# Altium PCB BatteryTestV1.1.PcbDoc (part 1 of 2)
Units mm, origin at the board's own origin, x right, y up, seen from the top; angles counter-clockwise.
Board outline 100 x 100 mm, 2 copper layers (Top Layer, Bottom Layer); 261 components, 215 nets, 797 pads, 447 vias.
Unrouted connection lines stored in the file: 1.
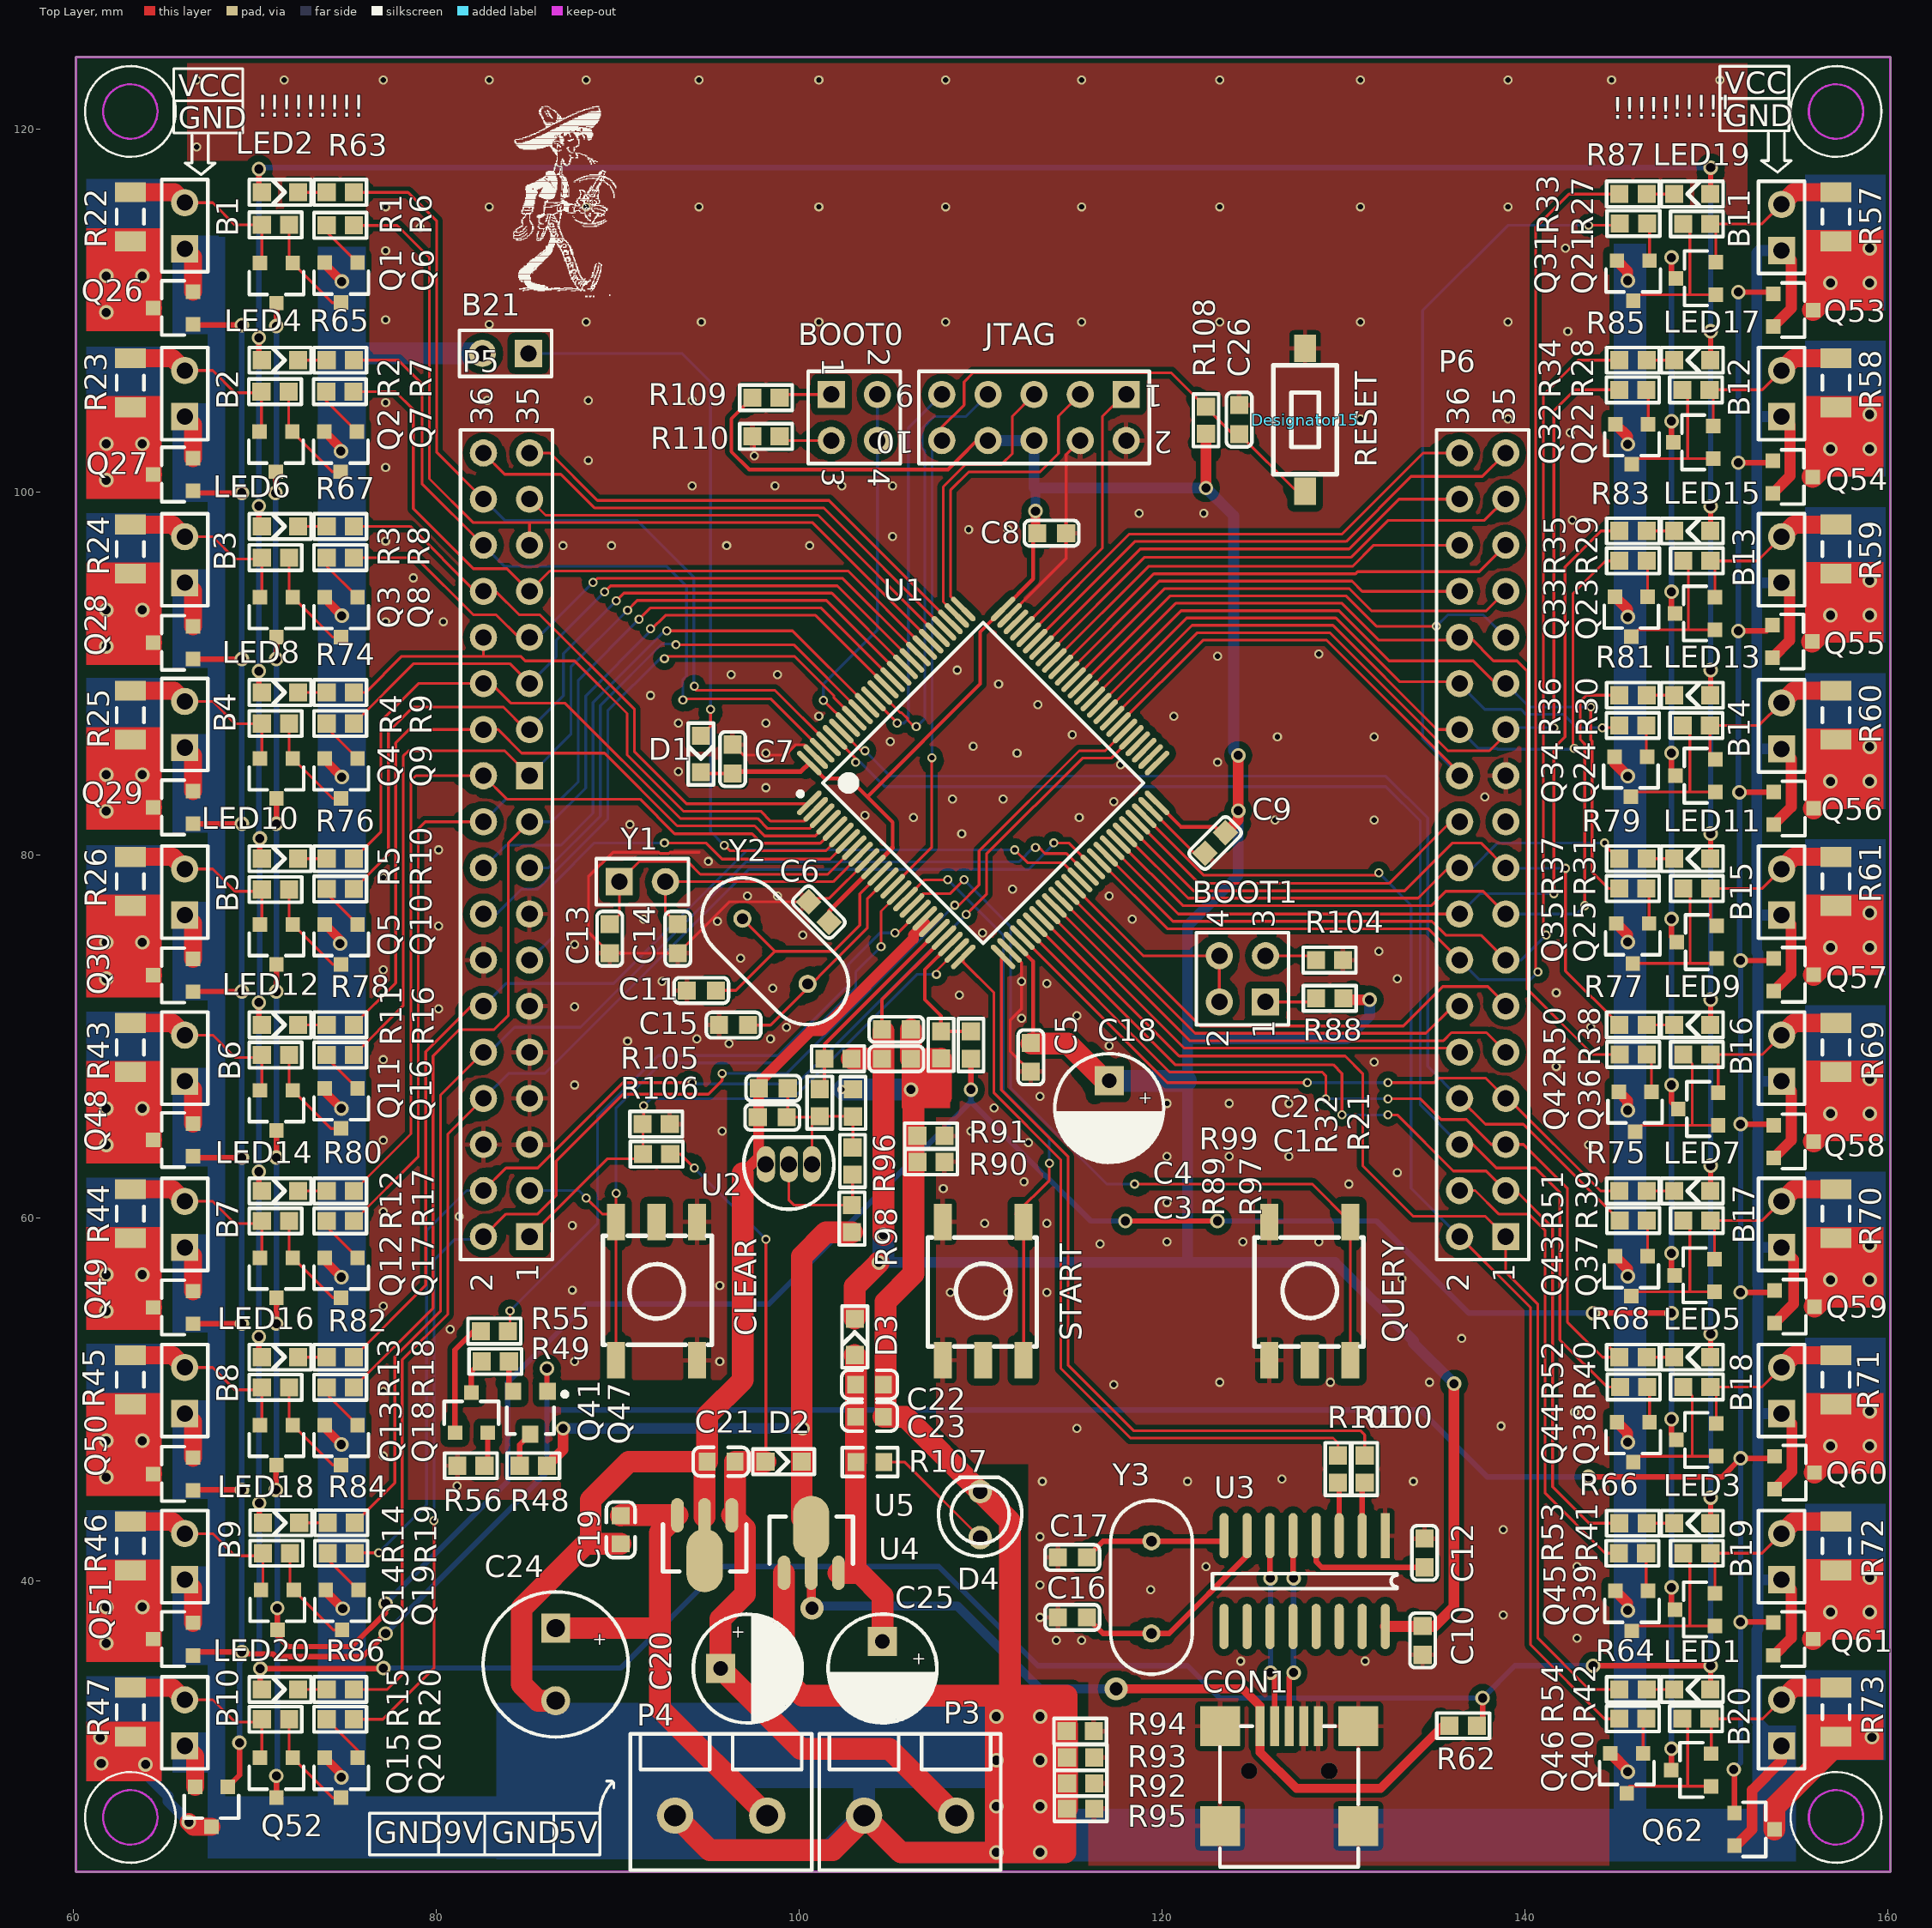
[diagram p0: Top Layer view]
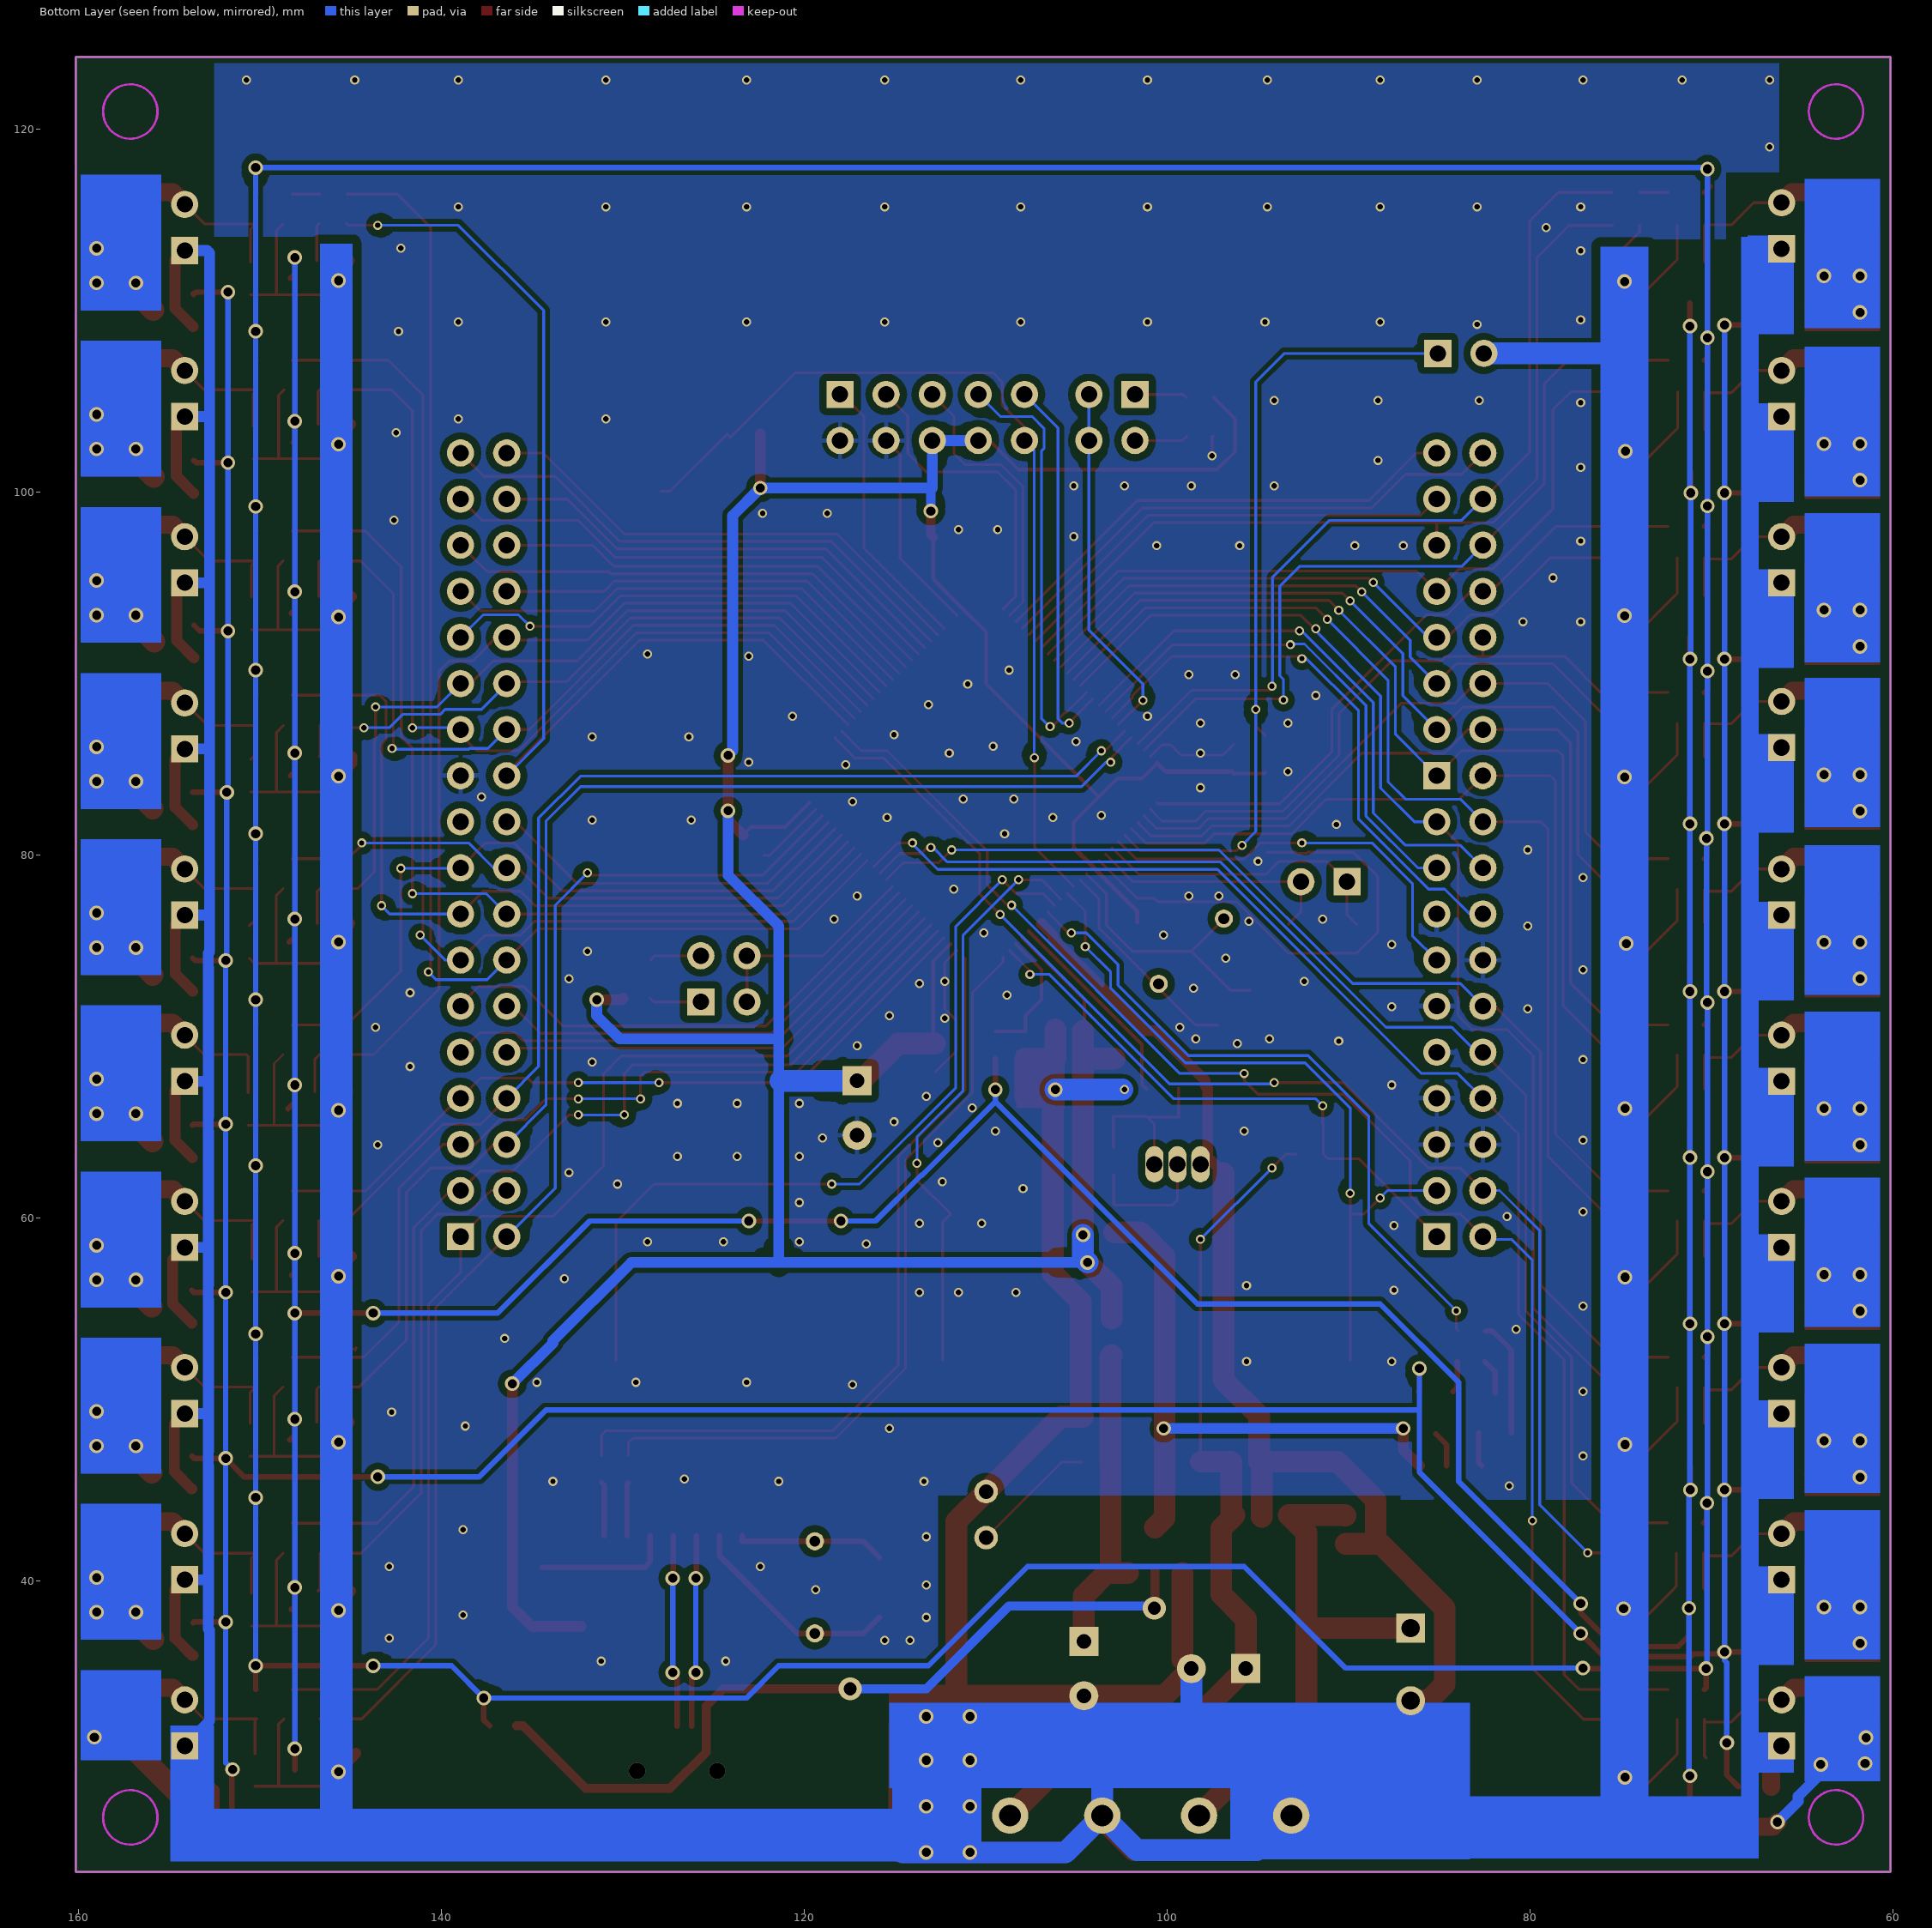
[diagram p1: Bottom Layer view, seen from below]

## Layer stack, top to bottom
Top Solder: solder mask 0.0102, Solder Resist, Dk 3.5
Top Layer: signal copper 0.0356
Dielectric 1: dielectric 0.32, FR-4, Dk 4.8
Bottom Layer: signal copper 0.0356
Bottom Solder: solder mask 0.0102, Solder Resist, Dk 3.5

## Board outline
60.147,23.952 60.147,123.952 160.147,123.952 160.147,23.952

## Design rules (kind name [scope] priority, off if disabled: settings)
Clearance [All] p1: gap=0.254 ignorepadtopadclearanceinfootprint=FALSE except(0: Arc-Hole Track-Hole SMDPad-Hole THPad-Hole Via-Hole Fill-Hole Poly-Hole Region-Hole Text-Hole)
PolygonConnect [All] p1: connectstyle=Relief reliefconductorwidth=0.254 reliefentries=4 polygonreliefangle="90 Angle" airgapwidth=0.254
RoutingVias [All] p1: holewidth=0.711 width=1.27 viastyle="Through Hole" minholewidth=0.711 minwidth=1.27 maxholewidth=0.711 maxwidth=1.27
SolderMaskExpansion [All] p1: expansion=0.102
Width [All] p1: maxlimit=0.254 minlimit=0.254 preferedwidth=0.254
30 further rules are at their usual default settings.

## Components (designator, comment, footprint, x,y, rotation, side; value= is the part's Value field where it differs from the comment)
B1 "Header 2" HDR1X2 66.147,113.387 r90 top
B2 "Header 2" HDR1X2 66.147,104.14 r90 top
B3 "Header 2" HDR1X2 66.147,94.981 r90 top
B4 "Header 2" HDR1X2 66.147,85.903 r90 top
B5 "Header 2" HDR1X2 66.147,76.67 r90 top
B6 "Header 2" HDR1X2 66.147,67.514 r90 top
B7 "Header 2" HDR1X2 66.147,58.359 r90 top
B8 "Header 2" HDR1X2 66.147,49.203 r90 top
B9 "Header 2" HDR1X2 66.147,40.048 r90 top
B10 "Header 2" HDR1X2 66.147,30.892 r90 top
B11 "Header 2" HDR1X2 154.147,113.292 r90 top
B12 "Header 2" HDR1X2 154.147,104.14 r90 top
B13 "Header 2" HDR1X2 154.147,94.981 r90 top
B14 "Header 2" HDR1X2 154.147,85.825 r90 top
B15 "Header 2" HDR1X2 154.147,76.67 r90 top
B16 "Header 2" HDR1X2 154.147,67.514 r90 top
B17 "Header 2" HDR1X2 154.147,58.359 r90 top
B18 "Header 2" HDR1X2 154.147,49.203 r90 top
B19 "Header 2" HDR1X2 154.147,40.048 r90 top
B20 "Header 2" HDR1X2 154.147,30.892 r90 top
B21 "Header 2" HDR1X2 85.09,107.62 r180 top
BOOT0 "Header 2X2" HDR2X2 101.778,105.359 r270 top (schematic designator P8)
BOOT1 "Header 2X2" HDR2X2 125.705,71.888 r90 top locked (schematic designator P7)
C1 "1uF" C_0603 105.365,68.749 r180 top
C2 "10nF" C_0603 105.365,70.374 r180 top
C3 "100nF" C_0603 98.527,65.532 r0 top
C4 "10uF" C_0603 98.577,67.132 r0 top
C5 "100nF" C_0603 112.776,68.834 r90 top
C6 "100nF" C_0603 101.092,76.835 r315 top
C7 "100nF" C_0603 96.342,85.268 r270 top
C8 "100nF" C_0603 113.919,97.714 r180 top
C9 "100nF" C_0603 122.936,80.645 r45 top
C10 "1UF" C_0603 134.366,36.703 r90 top
C11 "20pF" C_0603 94.615,72.517 r180 top
C12 "0.01UF" C_0603 134.472,41.527 r270 top
C13 "20pF" C_0603 89.57,75.367 r270 top
C14 "20pF" C_0603 93.32,75.367 r270 top
C15 "20pF" C_0603 96.393,70.612 r180 top
C16 "22pF" C_0603 115.062,37.973 r180 top
C17 "22pF" C_0603 115.062,41.275 r180 top
C18 "220uF/16V" C_6*7mm 117.094,66.04 r90 top
C19 "100nF" LC-0603_C 90.172,42.802 r90 top
C20 "220uF/16V" C_6*7mm 97.172,35.152 r180 top
C21 "100nF" LC-0603_C 95.697,46.552 r0 top
C22 "10uF" LC-0603_C 103.886,50.8 r0 top
C23 "10uF" LC-0603_C 103.886,49.022 r0 top
C24 "330uF/25V" C_8*12 86.589,35.382 r90 top
C25 "220uF/16V" C_6*7mm 104.597,35.154 r90 top
C26 "SMD-C" C_0603 124.257,103.975 r270 top
CLEAR "Key" KEY-3 92.147,55.952 r270 top (schematic designator K1)
CON1 "USB" MiniUSB 127.012,31.977 r0 top
D1 "Diode" DIODE-0603 94.59,85.547 r270 top
D2 "Diode" DIODE-0603 99.147,46.552 r0 top
D3 "Diode" DIODE-0603 103.072,53.427 r90 top
D4 "LED_R" LED_A2 109.982,43.637 r270 top
Designator15 "Comment" Key-6 127.889,103.962 r270 top
JTAG "Header 5X2" HDR2X5 118.034,105.359 r180 top (schematic designator P2)
LED1 "SMD-LED" DIODE-0603 149.225,34.002 r180 top
LED2 "SMD-LED" DIODE-0603 71.399,116.497 r0 top value=LED
LED3 "SMD-LED" DIODE-0603 149.225,43.158 r180 top
LED4 "SMD-LED" DIODE-0603 71.399,107.25 r0 top
LED5 "SMD-LED" DIODE-0603 149.225,52.313 r180 top value=LED
LED6 "SMD-LED" DIODE-0603 71.399,98.091 r0 top
LED7 "SMD-LED" DIODE-0603 149.225,61.469 r180 top value=LED
LED8 "SMD-LED" DIODE-0603 71.399,88.935 r0 top
LED9 "SMD-LED" DIODE-0603 149.225,70.624 r180 top value=LED
LED10 "SMD-LED" DIODE-0603 71.399,79.78 r0 top value=LED
LED11 "SMD-LED" DIODE-0603 149.225,79.78 r180 top
LED12 "SMD-LED" DIODE-0603 71.399,70.624 r0 top
LED13 "SMD-LED" DIODE-0603 149.225,88.783 r180 top value=LED
LED14 "SMD-LED" DIODE-0603 71.399,61.469 r0 top value=LED
LED15 "SMD-LED" DIODE-0603 149.225,97.837 r180 top
LED16 "SMD-LED" DIODE-0603 71.399,52.313 r0 top value=LED
LED17 "SMD-LED" DIODE-0603 149.225,107.25 r180 top
LED18 "SMD-LED" DIODE-0603 71.45,43.183 r0 top value=LED
LED19 "SMD-LED" DIODE-0603 149.225,116.402 r180 top value=LED
LED20 "SMD-LED" DIODE-0603 71.399,34.002 r0 top
P3 "Header 2" 2Pin_5.08 106.121,27.051 r180 top
P4 "Header 2" 2Pin_5.08 95.707,27.051 r180 top
P5 "Header 18X2" HDR2X18#1 85.147,58.952 r90 top locked
P6 "Header 18X2" HDR2X18#2 138.947,58.952 r90 top
Q1 "P_MOS" SOT-23-MOS 71.199,111.494 r270 top
Q2 "P_MOS" SOT-23-MOS 71.174,102.203 r270 top
Q3 "P_MOS" SOT-23-MOS 71.199,93.091 r270 top
Q4 "P_MOS" SOT-23-MOS 71.199,84.201 r270 top
Q5 "P_MOS" SOT-23-MOS 71.199,75.057 r270 top
Q6 "SMD-TRAN" SOT-23#1 74.767,111.519 r270 top
Q7 "SMD-TRAN" SOT-23#1 74.742,102.203 r270 top
Q8 "SMD-TRAN" SOT-23#1 74.767,93.091 r270 top value=NPN
Q9 "SMD-TRAN" SOT-23#1 74.767,84.201 r270 top value=NPN
Q10 "SMD-TRAN" SOT-23#1 74.767,75.057 r270 top
Q11 "P_MOS" SOT-23-MOS 71.199,65.913 r270 top
Q12 "P_MOS" SOT-23-MOS 71.199,56.691 r270 top
Q13 "P_MOS" SOT-23-MOS 71.199,47.471 r270 top
Q14 "P_MOS" SOT-23-MOS 71.25,38.379 r270 top
Q15 "P_MOS" SOT-23-MOS 71.199,29.134 r270 top
Q16 "SMD-TRAN" SOT-23#1 74.767,66.015 r270 top
Q17 "SMD-TRAN" SOT-23#1 74.767,56.691 r270 top value=NPN
Q18 "SMD-TRAN" SOT-23#1 74.767,47.471 r270 top
Q19 "SMD-TRAN" SOT-23#1 74.818,38.379 r270 top
Q20 "SMD-TRAN" SOT-23#1 74.767,29.134 r270 top
Q21 "P_MOS" SOT-23-MOS 149.423,111.76 r180 top
Q22 "P_MOS" SOT-23-MOS 149.276,102.718 r180 top
Q23 "P_MOS" SOT-23-MOS 149.377,93.294 r180 top
Q24 "P_MOS" SOT-23-MOS 149.411,84.353 r180 top
Q25 "P_MOS" SOT-23-MOS 149.479,75.184 r180 top
Q26 "AO3400" SOT-23-MOS 65.497,110.127 r180 top
Q27 "AO3400" SOT-23-MOS 65.497,100.952 r180 top
Q28 "AO3400" SOT-23-MOS 65.497,91.677 r180 top
Q29 "AO3400" SOT-23-MOS 65.497,82.602 r180 top
Q30 "AO3400" SOT-23-MOS 65.497,73.352 r180 top
Q31 "SMD-TRAN" SOT-23#1 145.974,111.633 r270 top value=NPN
Q32 "SMD-TRAN" SOT-23#1 145.898,102.616 r270 top
Q33 "SMD-TRAN" SOT-23#1 145.872,93.116 r270 top
Q34 "SMD-TRAN" SOT-23#1 145.847,84.303 r270 top value=NPN
Q35 "SMD-TRAN" SOT-23#1 145.948,75.108 r270 top
Q36 "P_MOS" SOT-23-MOS 149.555,65.989 r180 top
Q37 "P_MOS" SOT-23-MOS 149.352,56.82 r180 top
Q38 "P_MOS" SOT-23-MOS 149.454,47.752 r180 top
Q39 "P_MOS" SOT-23-MOS 149.377,38.405 r180 top
Q40 "P_MOS" SOT-23-MOS 149.174,29.566 r180 top
Q41 "PNP" SOT-23#2 85.192,49.251 r180 top
Q42 "SMD-TRAN" SOT-23#1 146.075,65.837 r270 top value=NPN
Q43 "SMD-TRAN" SOT-23#1 145.872,56.769 r270 top
Q44 "SMD-TRAN" SOT-23#1 145.974,47.625 r270 top
Q45 "SMD-TRAN" SOT-23#1 145.898,38.329 r270 top value=NPN
Q46 "SMD-TRAN" SOT-23#1 145.618,29.388 r270 top value=NPN
Q47 "SMD-TRAN" SOT-23#1 81.94,49.251 r90 top value=NPN
Q48 "AO3400" SOT-23-MOS 65.497,64.277 r180 top
Q49 "AO3400" SOT-23-MOS 65.497,55.052 r180 top
Q50 "AO3400" SOT-23-MOS 65.497,45.877 r180 top
Q51 "AO3400" SOT-23-MOS 65.497,36.777 r180 top
Q52 "AO3400" SOT-23-MOS 67.615,27.534 r270 top
Q53 "AO3400" SOT-23-MOS 154.788,110.007 r0 top
Q54 "AO3400" SOT-23-MOS 154.762,100.813 r0 top
Q55 "AO3400" SOT-23-MOS 154.737,91.745 r0 top
Q56 "AO3400" SOT-23-MOS 154.813,82.55 r0 top
Q57 "AO3400" SOT-23-MOS 154.813,73.381 r0 top
Q58 "AO3400" SOT-23-MOS 154.821,64.197 r0 top
Q59 "AO3400" SOT-23-MOS 154.864,55.093 r0 top
Q60 "AO3400" SOT-23-MOS 154.864,45.949 r0 top
Q61 "AO3400" SOT-23-MOS 154.788,36.779 r0 top
Q62 "AO3400" SOT-23-MOS 152.654,26.289 r0 top
QUERY "Key" KEY-3 128.147,55.952 r90 top (schematic designator K3)
R1 "Resistance" R_0603 71.226,114.701 r180 top
R2 "Resistance" R_0603 71.2,105.512 r180 top
R3 "Resistance" R_0603 71.226,96.368 r180 top value=100K
R4 "Resistance" R_0603 71.226,87.224 r180 top
R5 "Resistance" R_0603 71.226,78.08 r180 top
R6 "Resistance" R_0603 74.641,114.676 r0 top
R7 "Resistance" R_0603 74.615,105.512 r0 top value=4.7K
R8 "Resistance" R_0603 74.641,96.368 r0 top value=4.7K
R9 "Resistance" R_0603 74.641,87.224 r0 top value=4.7K
R10 "Resistance" R_0603 74.641,78.105 r0 top value=4.7K
R11 "Resistance" R_0603 71.226,68.961 r180 top
R12 "Resistance" R_0603 71.226,59.817 r180 top
R13 "Resistance" R_0603 71.226,50.648 r180 top value=100K
R14 "Resistance" R_0603 71.276,41.504 r180 top
R15 "Resistance" R_0603 71.226,32.36 r180 top
R16 "Resistance" R_0603 74.641,68.961 r0 top
R17 "Resistance" R_0603 74.641,59.817 r0 top value=4.7K
R18 "Resistance" R_0603 74.641,50.648 r0 top
R19 "Resistance" R_0603 74.692,41.504 r0 top value=4.7K
R20 "Resistance" R_0603 74.641,32.36 r0 top
R21 "Resistance" R_0603 109.474,69.584 r270 top value=300K
R22 "Resistance" C1206 63.147,115.152 r90 top
R23 "Resistance" C1206 63.147,106 r90 top
R24 "Resistance" C1206 63.147,96.841 r90 top value=4.7K
R25 "Resistance" C1206 63.147,87.685 r90 top value=4.7K
R26 "Resistance" C1206 63.147,78.53 r90 top
R27 "Resistance" R_0603 149.399,114.757 r0 top
R28 "Resistance" R_0603 149.352,105.613 r0 top value=100K
R29 "Resistance" R_0603 149.403,96.19 r0 top value=100K
R30 "Resistance" R_0603 149.377,87.122 r0 top
R31 "Resistance" R_0603 149.403,78.13 r0 top
R32 "Resistance" R_0603 107.823,69.444 r90 top value=100K
R33 "Resistance" R_0603 146.062,114.783 r180 top value=4.7K
R34 "Resistance" R_0603 146.025,105.613 r180 top value=4.7K
R35 "Resistance" R_0603 146.037,96.19 r180 top value=4.7K
R36 "Resistance" R_0603 146.025,87.122 r180 top
R37 "Resistance" R_0603 146.025,78.13 r180 top value=4.7K
R38 "Resistance" R_0603 149.403,68.986 r0 top value=100K
R39 "Resistance" R_0603 149.403,59.842 r0 top
R40 "Resistance" R_0603 149.403,50.673 r0 top value=100K
R41 "Resistance" R_0603 149.403,41.504 r0 top
R42 "Resistance" R_0603 149.352,32.385 r0 top value=100K
R43 "Resistance" C1206 63.147,69.374 r90 top value=4.7K
R44 "Resistance" C1206 63.147,60.219 r90 top
R45 "Resistance" C1206 63.147,51.063 r90 top value=4.7K
R46 "Resistance" C1206 63.147,41.908 r90 top value=4.7K
R47 "Resistance" C1206 63.147,32.752 r90 top
R48 "Resistance" R_0603 85.434,46.33 r180 top value=4.7K
R49 "Resistance" R_0603 83.337,52.07 r180 top
R50 "Resistance" R_0603 146.05,68.986 r180 top
R51 "Resistance" R_0603 146.05,59.842 r180 top value=4.7K
R52 "Resistance" R_0603 146.075,50.673 r180 top
R53 "Resistance" R_0603 146.011,41.504 r180 top value=4.7K
R54 "Resistance" R_0603 146.025,32.385 r180 top
R55 "Resistance" R_0603 83.134,53.746 r0 top
R56 "Resistance" R_0603 81.991,46.33 r180 top value=0R
R57 "Resistance" C1206 157.147,115.152 r90 top
R58 "Resistance" C1206 157.147,106 r90 top value=4.7K
R59 "Resistance" C1206 157.147,96.841 r90 top value=4.7K
R60 "Resistance" C1206 157.147,87.685 r90 top
R61 "Resistance" C1206 157.147,78.53 r90 top
R62 "Resistance" R_0603 136.525,32.004 r0 top
R63 "Resistance" R_0603 74.793,116.497 r180 top
R64 "Resistance" R_0603 146.037,34.002 r180 top
R65 "Resistance" R_0603 74.793,107.25 r180 top
R66 "Resistance" R_0603 146.037,43.158 r180 top value=4.7K
R67 "Resistance" R_0603 74.793,98.091 r180 top value=4.7K
R68 "Resistance" R_0603 146.037,52.313 r180 top
R69 "Resistance" C1206 157.147,69.374 r90 top
R70 "Resistance" C1206 157.147,60.219 r90 top
R71 "Resistance" C1206 157.147,51.063 r90 top
R72 "Resistance" C1206 157.147,41.908 r90 top
R73 "Resistance" C1206 157.147,32.752 r90 top value=4.7K
R74 "Resistance" R_0603 74.793,88.935 r180 top
R75 "Resistance" R_0603 146.037,61.469 r180 top
R76 "Resistance" R_0603 74.793,79.78 r180 top value=4.7K
R77 "Resistance" R_0603 146.037,70.624 r180 top value=4.7K
R78 "Resistance" R_0603 74.793,70.624 r180 top
R79 "Resistance" R_0603 146.037,79.78 r180 top value=4.7K
R80 "Resistance" R_0603 74.793,61.469 r180 top value=4.7K
R81 "Resistance" R_0603 146.037,88.783 r180 top
R82 "Resistance" R_0603 74.793,52.313 r180 top
R83 "Resistance" R_0603 146.037,97.837 r180 top
R84 "Resistance" R_0603 74.844,43.183 r180 top
R85 "Resistance" R_0603 146.037,107.25 r180 top value=4.7K
R86 "Resistance" R_0603 74.793,34.002 r180 top value=4.7K
R87 "Resistance" R_0603 146.037,116.402 r180 top
R88 "Resistance" R_0603 129.172,72.085 r0 top
R89 "Resistance" R_0603 101.143,66.409 r270 top value=0R
R90 "Resistance" R_0603 107.354,63.068 r180 top
R91 "Resistance" R_0603 107.345,64.508 r180 top value=0R
R92 "Resistance" R_0603 115.597,28.827 r180 top value=0R
R93 "Resistance" R_0603 115.597,30.252 r180 top
R94 "Resistance" R_0603 115.572,31.702 r180 top
R95 "Resistance" R_0603 115.597,27.427 r180 top
R96 "Resistance" R_0603 102.946,63.195 r270 top value=0R
R97 "Resistance" R_0603 102.972,66.243 r90 top value=0R
R98 "Resistance" R_0603 102.921,59.868 r90 top value=470R
R99 "Resistance" R_0603 102.069,68.758 r0 top value=0R
R100 "Resistance" R_0603 131.173,46.073 r90 top
R101 "Resistance" R_0603 129.698,46.073 r90 top value=300R
R104 "Resistance" R_0603 129.159,74.193 r0 top
R105 "SMD-R" R_0603 92.202,65.151 r180 top
R106 "SMD-R" R_0603 92.075,63.5 r0 top value=100k
R107 "4.7K" LC-0603_R 103.911,46.533 r180 top
R108 "Resistance" R_0603 122.428,104.013 r270 top value=10K
R109 "Resistance" R_0603 98.259,105.181 r180 top value=10K
R110 "Resistance" R_0603 98.259,103.048 r180 top value=10K
START "Key" KEY-3 110.147,55.952 r90 top (schematic designator K2)
U1 "STM32F103VBT6" STM-LQFP100_N 110.147,83.952 r45 top locked
U2 "TL431" TO-92A 99.441,62.941 r90 top
U3 "CH340G" SOP16 132.308,42.473 r270 top
U4 "L78L05" LC-SOT-89(SOT-89-3) 94.797,43.602 r90 top
U5 "7133-1" LC-SOT-89(SOT-89-3) 100.672,40.427 r270 top
Y1 "32.768k" HDR1X2 90.094,78.511 r0 top
Y2 "32.768k" XTAL 98.679,74.676 r135 top
Y3 "12M" XTAL 119.422,39.627 r90 top

## Footprints (in the part's own frame and the unit in brackets; to place one, negate y for a bottom-side part, rotate by r counter-clockwise, add the part's x,y. Pads: shape width x height; smd on the part's side, far side on the other; paste and mask are expansions set on the pad)
2Pin_5.08 [mm] "2pin 5.08"
  round 2 hole 1.2 mask+0.05: 1(-2.54,0) 2(2.54,0)
  silkscreen extent -5,-4.5 5,3
C1206 [mm] "Chip Capacitor, Body 3.2x1.6mm, IPC High Density"
  rect 1.1x1.7 smd: 1(-1.35,0) 2(1.35,0)
  silkscreen extent -0.4,-0.75 0.4,0.75, body extent -1.7,-0.9 1.7,0.9, height 1.3
C_6*7mm [mm] "电解电容"
  rect 1.6x1.6 hole 0.8: 1(1.5,0)
  round 1.6 hole 0.8: 2(-1.5,0)
  silkscreen extent -3,-3 3,3, body extent -3,-3 3,3, height 7
C_8*12 [mm] "铝电解电容"
  rect 1.6x1.6 hole 1: 1(2,0)
  round 1.6 hole 1: 2(-2,0)
  silkscreen extent -4,-4 4,4, body extent -4,-4 4,4, height 12
C_0603 [mm]
  rect 1x1 smd: 1(-0.8,0) 2(0.8,0)
  silkscreen extent -1.5,-0.7 1.5,0.7
DIODE-0603 [mm] "LED"
  rect 1x1 smd: 1(-1,0) 2(1,0)
  silkscreen extent -1.7,-0.7 1.7,0.7, body extent -0.85,-0.45 0.85,0.45, height 0.5
HDR1X2 [mm] "Connector; Header; 2 Position"
  rect 1.5x1.5 hole 0.9: 1(0,0)
  round 1.5 hole 0.9: 2(2.54,0)
  silkscreen extent -1.27,-1.27 3.81,1.27
HDR2X2 [mm] "Connector; Header; 2x2 Position"
  rect 1.5x1.5 hole 0.9: 1(0,0)
  round 1.5 hole 0.9: 2(0,2.54) 3(2.54,0) 4(2.54,2.54)
  silkscreen extent -1.27,-1.27 3.81,3.81
HDR2X5 [mm] "Connector; Header; 5x2 Position"
  rect 1.5x1.5 hole 0.9: 1(0,0)
  round 1.5 hole 0.9: 2(0,2.54) 3(2.54,0) 4(2.54,2.54) 5(5.08,0) 6(5.08,2.54) 7(7.62,0) 8(7.62,2.54) 9(10.16,0) 10(10.16,2.54)
  silkscreen extent -1.27,-1.27 11.43,3.81
HDR2X18#1 [mm] "Connector; Header; 18x2 Position"
  rect 1.5x1.5 hole 0.9: 1(0,0) 21(25.4,0)
  round 1.5 hole 0.9: 2(0,2.54) 3(2.54,0) 4(2.54,2.54) 5(5.08,0) 6(5.08,2.54) 7(7.62,0) 8(7.62,2.54) 9(10.16,0) 10(10.16,2.54) 11(12.7,0) 12(12.7,2.54) 13(15.24,0) 14(15.24,2.54) 15(17.78,0) 16(17.78,2.54) 17(20.32,0) 18(20.32,2.54) 19(22.86,0) 20(22.86,2.54) 22(25.4,2.54) 23(27.94,0) 24(27.94,2.54) 25(30.48,0) 26(30.48,2.54) 27(33.02,0) 28(33.02,2.54) 29(35.56,0) 30(35.56,2.54) 31(38.1,0) 32(38.1,2.54) 33(40.64,0) 34(40.64,2.54) 35(43.18,0) 36(43.18,2.54)
  silkscreen extent -1.27,-1.27 44.45,3.81
HDR2X18#2 [mm] "Connector; Header; 18x2 Position"
  rect 1.5x1.5 hole 0.9: 1(0,0)
  round 1.5 hole 0.9: 2(0,2.54) 3(2.54,0) 4(2.54,2.54) 5(5.08,0) 6(5.08,2.54) 7(7.62,0) 8(7.62,2.54) 9(10.16,0) 10(10.16,2.54) 11(12.7,0) 12(12.7,2.54) 13(15.24,0) 14(15.24,2.54) 15(17.78,0) 16(17.78,2.54) 17(20.32,0) 18(20.32,2.54) 19(22.86,0) 20(22.86,2.54) 21(25.4,0) 22(25.4,2.54) 23(27.94,0) 24(27.94,2.54) 25(30.48,0) 26(30.48,2.54) 27(33.02,0) 28(33.02,2.54) 29(35.56,0) 30(35.56,2.54) 31(38.1,0) 32(38.1,2.54) 33(40.64,0) 34(40.64,2.54) 35(43.18,0) 36(43.18,2.54)
  silkscreen extent -1.27,-1.27 44.45,3.81
KEY-3 [mm]
  rect 2x1 smd: 1(-3.81,-2.23) 1(3.81,-2.23) 2(-3.81,2.23) 2(3.81,2.23) 3(-3.81,0)
  silkscreen extent -3.05,-2.95 2.95,3.05, body extent -3.1,-2.97 2.97,3.1, height 3
Key-6 [mm]
  rect 1.5x1.2 smd: 1(-3.937,0) 2(3.937,0)
  silkscreen extent -3,-1.75 3,1.75
LC-0603_C [mm]
  rect 0.93x0.98 smd: 1(-0.77,0) 2(0.77,0)
  silkscreen extent -1.53,-0.79 1.54,0.79, body extent -0.8,-0.4 0.8,0.4, height 0.3
LC-0603_R [mm]
  rect 0.93x0.98 smd: 1(-0.77,0) 2(0.77,0)
  silkscreen extent -1.53,-0.79 1.54,0.79, body extent -0.85,-0.4 0.85,0.4, height 0.56
LC-SOT-89(SOT-89-3) [mm]
  oval 1.9x0.7 smd: 1(0,-1.5) 3(0,1.5)
  oval 3.5x2 smd: 2(-2.5,0)
  oval 2.1x0.7 smd: 2(-0.1,0)
  silkscreen extent -3.1,-2.3 -0.5,2.3, body extent -3.75,-2.25 0.55,2.25, height 1.51
LED_A2 [mm] "直径3MM二极管"
  round 1.3 hole 0.8: 1(1.27,0) 2(-1.27,0)
  silkscreen extent -2.06,-2.3 2.3,2.3
MiniUSB [mm]
  rect 0.5x2.2 smd mask+0.05: 1(-1.6,0) 2(-0.8,0) 3(0,0) 4(0.8,0) 5(1.6,0)
  rect 2.2x2.2 smd mask+0.05: 6(-3.81,-5.5) 6(-3.81,0) 6(3.81,-5.5) 6(3.81,0)
  silkscreen extent -3.81,-7.75 3.81,0
R_0603 [mm]
  rect 1x1 smd: 1(-0.674,0) 2(0.826,0)
  silkscreen extent -1.37,-0.7 1.53,0.7
SOP16 [mm]
  rect 2.5x0.5 smd: 1(0,0)
  oval 2.5x0.5 smd: 2(0,-1.27) 3(0,-2.54) 4(0,-3.81) 5(0,-5.08) 6(0,-6.35) 7(0,-7.62) 8(0,-8.89) 9(5,-8.89) 10(5,-7.62) 11(5,-6.35) 12(5,-5.08) 13(5,-3.81) 14(5,-2.54) 15(5,-1.27) 16(5,0)
  silkscreen extent 2.08,-9.52 2.92,0.64
SOT-23#1 [mm] "3Pin"
  rect 0.8x0.8 smd: 1(1.1,0) 2(-1.1,0.9) 3(-1.1,-0.9)
  silkscreen extent -0.62,-1.5 0.63,1.5
SOT-23#2 [mm]
  rect 0.9x0.95 smd: 1(-0.95,-1.175) 2(0.95,-1.175) 3(0,1.175)
  silkscreen extent -2.03,-1.14 1.3,1.18
SOT-23-MOS [mm] "3Pin"
  rect 0.8x0.8 smd: 1(-1.1,0.9) 2(-1.1,-0.9) 3(1.1,0)
  silkscreen extent -0.63,-1.5 0.63,1.5
STM-LQFP100_N [mm] "Thin QFP, 100-Leads, Body 14x14mm, Pitch 0.5mm, IPC Medium Density"
  oval 1.8x0.3 smd: 1(-7.55,6) 2(-7.55,5.5) 3(-7.55,5) 4(-7.55,4.5) 5(-7.55,4) 6(-7.55,3.5) 7(-7.55,3) 8(-7.55,2.5) 9(-7.55,2) 10(-7.55,1.5) 11(-7.55,1) 12(-7.55,0.5) 13(-7.55,0) 14(-7.55,-0.5) 15(-7.55,-1) 16(-7.55,-1.5) 17(-7.55,-2) 18(-7.55,-2.5) 19(-7.55,-3) 20(-7.55,-3.5) 21(-7.55,-4) 22(-7.55,-4.5) 23(-7.55,-5) 24(-7.55,-5.5) 25(-7.55,-6) 51(7.55,-6) 52(7.55,-5.5) 53(7.55,-5) 54(7.55,-4.5) 55(7.55,-4) 56(7.55,-3.5) 57(7.55,-3) 58(7.55,-2.5) 59(7.55,-2) 60(7.55,-1.5) 61(7.55,-1) 62(7.55,-0.5) 63(7.55,0) 64(7.55,0.5) 65(7.55,1) 66(7.55,1.5) 67(7.55,2) 68(7.55,2.5) 69(7.55,3) 70(7.55,3.5) 71(7.55,4) 72(7.55,4.5) 73(7.55,5) 74(7.55,5.5) 75(7.55,6)
  oval 0.3x1.8 smd: 26(-6,-7.55) 27(-5.5,-7.55) 28(-5,-7.55) 29(-4.5,-7.55) 30(-4,-7.55) 31(-3.5,-7.55) 32(-3,-7.55) 33(-2.5,-7.55) 34(-2,-7.55) 35(-1.5,-7.55) 36(-1,-7.55) 37(-0.5,-7.55) 38(0,-7.55) 39(0.5,-7.55) 40(1,-7.55) 41(1.5,-7.55) 42(2,-7.55) 43(2.5,-7.55) 44(3,-7.55) 45(3.5,-7.55) 46(4,-7.55) 47(4.5,-7.55) 48(5,-7.55) 49(5.5,-7.55) 50(6,-7.55) 76(6,7.55) 77(5.5,7.55) 78(5,7.55) 79(4.5,7.55) 80(4,7.55) 81(3.5,7.55) 82(3,7.55) 83(2.5,7.55) 84(2,7.55) 85(1.5,7.55) 86(1,7.55) 87(0.5,7.55) 88(0,7.55) 89(-0.5,7.55) 90(-1,7.55) 91(-1.5,7.55) 92(-2,7.55) 93(-2.5,7.55) 94(-3,7.55) 95(-3.5,7.55) 96(-4,7.55) 97(-4.5,7.55) 98(-5,7.55) 99(-5.5,7.55) 100(-6,7.55)
  silkscreen extent -7.67,-6.25 6.25,6.82, body extent -7,-7 7,7, height 1.6
TO-92A [mm]
  oval 2x1 hole 0.9: 1(0,-1.27) 2(0,0) 3(0,1.27)
  silkscreen extent -2.48,-2.48 1.5,2.48
XTAL [mm]
  round 1 hole 0.6: 1(-2.54,0) 2(2.54,0)
  silkscreen extent -4.79,-2.25 4.79,2.25

## Part data
B1 B2 B3 B4 B5 B6 B7 B8 B9 B10 B11 B12 B13 B14 B15 B16 B17 B18 B19 B20 B21 P3 P4: "Header, 2-Pin"
  B2 B3 B4 B5 B7 B9 B10 B12 B14 B21 P3 P4: LatestRevisionDate=17-Jul-2002, LatestRevisionNote="Re-released for DXP Platform.", Publisher="Altium Limited"
BOOT0 BOOT1: "Header, 2-Pin, Dual row"
  BOOT1: LatestRevisionDate=17-Jul-2002, LatestRevisionNote="Re-released for DXP Platform.", Publisher="Altium Limited"
C1 C2 C3 C4 C5 C6 C7 C8 C9 C10 C11 C12 C13 C14 C15 C16 C17: library part CAP, "无极性电容"
C18 C20 C24 C25: library part "Cap Pol", "插针铝电解电容"
  C20 C24: LatestRevisionDate=17-Jul-2002, LatestRevisionNote="Re-released for DXP Platform.", PackageReference=RB7.6-15, Published=8-Jun-2000, Publisher="Altium Limited"
C19 C21 C22 C23: library part Cap, "无极性电容"
  C21: LatestRevisionDate=17-Jul-2002, LatestRevisionNote="Re-released for DXP Platform.", PackageReference=RAD-0.3, Published=8-Jun-2000, Publisher="Altium Limited"
C26: library part SC, "SMD-CAP"
CLEAR QUERY START: library part Swich
CON1: library part USB_B, "USB connector"
D1 D2 D3: "Default Diode"
D4: library part LED3, "发光二极管红色", DatasheetVersion=16-Apr-2002, LatestRevisionDate=17-Dec-2003, LatestRevisionNote="PCB Footprint replaced.", PackageReference=3.5X2.8X1.9, PackageVersion=16-Apr-2002, Published=8-Jun-2000, Publisher="Altium Limited"
JTAG: "Header, 5-Pin, Dual row", LatestRevisionDate=17-Jul-2002, LatestRevisionNote="Re-released for DXP Platform.", Publisher="Altium Limited"
LED1 LED2 LED3 LED4 LED5 LED6 LED7 LED8 LED9 LED10 LED11 LED12 LED13 LED14 LED15 LED16 LED17 LED18 LED19 LED20: library part LED, "LED"
P5 P6: "Header, 18-Pin, Dual row"
  P5: LatestRevisionDate=17-Jul-2002, LatestRevisionNote="Re-released for DXP Platform.", Publisher="Altium Limited"
Q6 Q7 Q8 Q9 Q10 Q16 Q17 Q18 Q19 Q20 Q31 Q32 Q33 Q34 Q35 Q42 Q43 Q44 Q45 Q46 Q47: library part NPN, "S8550-J3Y"
Q26 Q27 Q28 Q29 Q30 Q48 Q49 Q50 Q51 Q52 Q53 Q54 Q55 Q56 Q57 Q58 Q59 Q60 Q61 Q62: library part N_MOS
R1 R2 R3 R4 R5 R6 R7 R8 R9 R10 R11 R12 R13 R14 R15 R16 R17 R18 R19 R20 R21 R22 R23 R24 R25 R26 R27 R28 R29 R30 R31 R32 R33 R34 R35 R36 R37 R38 R39 R40 R41 R42 R43 R44 R45 R46 R47 R48 R49 R50 R51 R52 R53 R54 R55 R56 R57 R58 R59 R60 R61 R62 R63 R64 R65 R66 R67 R68 R69 R70 R71 R72 R73 R74 R75 R76 R77 R78 R79 R80 R81 R82 R83 R84 R85 R86 R87 R88 R89 R90 R91 R92 R93 R94 R95 R96 R97 R98 R99 R100 R101 R104 R108 R109 R110: "Power Resistance"
R105 R106: library part SR, "SMD-RES"
R107: library part Res1, "贴片电阻"
U1: "ARM Cortex-M3 32-bit MCU, 128 KB Flash, 20 KB Internal RAM, 80 I/Os, 100-pin LQFP, -40 to 85 degC, Tray"
U4: library part LM7805, "电源管理IC"
U5: "电源管理IC"
Y1 Y2 Y3: library part XTAL, "贴片晶振"

## Via types
v1: diameter 0.5, hole 0.3, Top Layer to Bottom Layer, tented both sides, 269 vias
v2: diameter 0.8, hole 0.5, Top Layer to Bottom Layer, tented both sides, 174 vias
v3: diameter 0.9, hole 0.9, Top Layer to Bottom Layer, tented both sides, 2 vias
v4: diameter 1.27, hole 0.711, Top Layer to Bottom Layer, tented both sides, 2 vias

## Nets (pads, with @x,y where several pads share a name; then routed paths per layer and width w, separated by ;. In a path a pad name is that pad's centre, name@x,y a point inside that pad or via, vN(x,y) a via of type N, cw(c..) or ccw(c..) an arc to the next point about the centre after c; other vN are vias at no path point)
ADC: R21.1 R32.2 U1.23 | length 7.4
  Top Layer w0.2: U1.23@108.344,75.078 106.934,73.668 106.934,72.009 107.823,71.12 R32.2@107.823,70.27 107.835,70.258 R21.1@109.474,70.258
AGND: B1.1 B2.1 B3.1 B4.1 B5.1 B6.1 B7.1 B8.1 B9.1 B10.1 B11.1 B12.1 B13.1 B14.1 B15.1 B16.1 B17.1 B18.1 B19.1 B20.1 B21.2 C1.1 C2.1 C3.1 C4.1 C19.1 C20.2 C21.1 C22.2 C23.2 C24.2 C25.2 D4.2 P3.2 P4.2 Q6.3 Q7.3 Q8.3 Q9.3 Q10.3 Q16.3 Q17.3 Q18.3 Q19.3 Q20.3 Q26.2 Q27.2 Q28.2 Q29.2 Q30.2 Q31.3 Q32.3 Q33.3 Q34.3 Q35.3 Q42.3 Q43.3 Q44.3 Q45.3 Q46.3 Q48.2 Q49.2 Q50.2 Q51.2 Q52.2 Q53.2 Q54.2 Q55.2 Q56.2 Q57.2 Q58.2 Q59.2 Q60.2 Q61.2 Q62.2 R32.1 R90.2 R91.2 R92.2 R93.2 R94.2 R95.2 R97.2 U1.19 U1.20 U2.3 U4.2 U5.1 | length 416.9
  Top Layer w0.5: Q7.3@73.842,103.303 74.752,102.392 v2(74.752,102.235) ; Q20.3@73.867,30.234 74.778,29.323 v2(74.778,29.159) ; Q18.3@73.867,48.571 73.867,48.409 v2(74.778,47.498) ; Q17.3@73.867,57.791 73.867,57.629 v2(74.778,56.718) ; Q16.3@73.867,67.115 73.867,66.925 v2(74.778,66.015) ; Q10.3@73.867,76.157 74.701,75.323 v2(74.701,75.108) ; Q9.3@73.867,85.301 73.867,85.213 v2(74.803,84.277) ; Q8.3@73.867,94.191 73.867,94.103 v2(74.803,93.167) ; Q6.3@73.867,112.619 73.867,112.518 v2(74.803,111.582) ; Q19.3@73.918,39.479 73.918,39.392 v2(74.854,38.456)
  Top Layer w0.6: 96.901,62.458 97.777,63.335 C4.1@97.777,67.132 97.917,67.272 97.917,67.564 100.647,70.294 101.222,70.294 106.299,75.372 106.299,75.565 106.934,76.2 ; Q46.3@144.718,30.488 145.669,29.537 v2(145.669,29.464) ; Q34.3@144.947,85.403 144.947,85.05 v2(145.669,84.328) ; Q43.3@144.972,57.869 145.669,57.172 v2(145.669,56.769) ; Q33.3@144.972,94.216 145.669,93.52 v2(145.669,93.091) ; Q45.3@144.998,39.429 145.669,38.757 v2(145.669,38.354) ; Q32.3@144.998,103.716 145.669,103.045 v2(145.669,102.616) ; Q35.3@145.048,76.208 145.669,75.587 v2(145.669,75.184) ; Q44.3@145.074,48.725 145.669,48.13 v2(145.669,47.625) ; Q31.3@145.074,112.733 145.669,112.138 v2(145.669,111.633) ; Q42.3@145.175,66.937 145.669,66.443 v2(145.669,65.913) ; Q62.2@151.554,25.389 151.627,25.389 152.527,26.289 152.527,28.448 154.147,30.068 B20.1@154.147,30.892 ; Q55.2@153.637,90.845 154.591,91.799 154.591,94.537 B13.1@154.147,94.981 ; Q54.2@153.662,99.913 154.616,100.867 154.616,103.671 B12.1@154.147,104.14 ; Q61.2@153.688,35.879 153.735,35.879 154.686,36.83 154.686,39.509 B19.1@154.147,40.048 ; Q53.2@153.688,109.107 154.686,110.106 154.686,112.753 B11.1@154.147,113.292 ; Q57.2@153.713,72.481 154.667,73.435 154.667,76.15 B15.1@154.147,76.67 ; Q56.2@153.713,81.65 154.686,82.623 154.686,85.287 B14.1@154.147,85.825 ; Q58.2@153.721,63.297 154.686,64.262 154.686,66.975 B16.1@154.147,67.514 ; Q60.2@153.764,45.049 154.718,46.003 154.718,48.633 B18.1@154.147,49.203 ; Q59.2@153.764,54.193 154.81,55.239 154.81,55.571 154.813,55.574 154.813,57.693 B17.1@154.147,58.359
  Top Layer w1: B10.1@66.147,30.892 66.715,30.324 Q52.2@66.715,28.634 ; B9.1@66.147,40.048 66.597,39.598 Q51.2@66.597,37.677 ; B8.1@66.147,49.203 66.597,48.753 Q50.2@66.597,46.777 ; B7.1@66.147,58.359 66.597,57.909 Q49.2@66.597,55.952 ; B6.1@66.147,67.514 66.597,67.064 Q48.2@66.597,65.177 ; B5.1@66.147,76.67 66.597,76.22 Q30.2@66.597,74.252 ; B4.1@66.147,85.903 66.597,85.453 Q29.2@66.597,83.502 ; B3.1@66.147,94.981 66.597,94.531 Q28.2@66.597,92.577 ; B2.1@66.147,104.14 66.597,103.69 Q27.2@66.597,101.852 ; B1.1@66.147,113.387 66.597,112.937 Q26.2@66.597,111.027
  Top Layer w1.2: C24.2@86.589,33.382 85.617,33.382 84.709,34.29 84.709,38.481 88.26,42.032 88.651,42.032 ; C19.1@90.172,42.032 88.651,42.032 ; P4.2@93.167,27.051 95.072,25.146 101.854,25.146 103.581,26.873 P3.2@103.581,27.051 105.613,25.019 114.681,25.019 114.681,27.337 R95.2@114.771,27.427 R93.2@114.771,30.252 R94.2@114.771,32.041 ; U4.2@94.797,43.502 C21.1@94.797,46.552 ; 96.901,62.458 96.901,51.054 94.927,49.08 C21.1@94.927,46.552 C21.1@94.797,46.552 ; U5.1@99.172,40.427 99.172,35.652 C20.2@98.672,35.152 100.171,33.654 C25.2@104.597,33.654 111.634,33.654 ; C2.1@106.165,70.374 C1.1@106.165,68.749 107.802,68.749 R32.1@107.823,68.77 107.823,66.65 ; v2@106.299,66.929 106.299,56.896 104.775,55.372 104.775,49.141 C23.2@104.656,49.022 105.867,49.022 D4.2@109.982,44.907 111.633,43.256 111.633,33.655 111.634,33.654 ; R94.2@114.746,31.702 114.746,33.654 111.634,33.654 ; 88.651,42.032 88.519,42.164 88.519,44.45 90.621,46.552 C21.1@94.797,46.552
  Bottom Layer w0.6: B20.1@154.147,30.892 152.781,32.258 152.781,37.259 152.846,37.324 152.846,38.114 152.843,38.117 152.843,40.005 ; B19.1@154.147,40.048 152.886,40.048 152.843,40.005 ; B18.1@154.147,49.203 153.024,49.203 152.843,49.022 ; B17.1@154.147,58.359 152.909,58.359 152.843,58.293 ; B16.1@154.147,67.514 152.893,67.514 152.843,67.564 ; B15.1@154.147,76.67 152.821,76.67 152.783,76.708 ; B14.1@154.147,85.825 152.808,85.825 152.781,85.852 ; B13.1@154.147,94.981 152.893,94.981 152.781,94.869 ; B12.1@154.147,104.14 152.781,104.14 ; B11.1@154.147,113.292 152.916,113.292 152.781,113.157 152.781,104.14 ; 152.781,85.852 152.781,94.869 ; 152.781,85.852 152.781,83.836 152.783,83.834 152.783,76.708 ; 152.781,94.869 152.781,104.14 ; 152.783,76.708 152.783,74.627 152.846,74.563 152.846,73.773 152.843,73.77 152.843,67.564 ; 152.843,40.005 152.843,46.338 152.846,46.341 152.846,47.131 152.843,47.134 152.843,49.022 ; 152.843,49.022 152.843,55.482 152.846,55.485 152.846,56.275 152.843,56.278 152.843,58.293 ; 152.843,58.293 152.843,64.753 152.846,64.756 152.846,65.546 152.843,65.549 152.843,67.564
  Bottom Layer w1.2: 74.6,107.62 B21.2@82.55,107.62 ; 86.589,26.137 C24.2@86.589,33.382 ; P4.2@93.167,27.051 95.072,25.146 101.676,25.146 P3.2@103.581,27.051 ; 98.672,31.122 C20.2@98.672,35.152 ; v1@102.463,67.056 v2(106.172,67.056) ; 103.581,30.785 P3.2@103.581,27.051 ; 104.597,31.166 C25.2@104.597,33.654 ; 114.554,31.115 114.554,25.019 105.613,25.019 P3.2@103.581,27.051
  other v1: 102.362,67.056
  other v2: 110.871,25.019 113.284,25.019 110.871,27.559 113.284,27.559 110.871,30.099 113.284,30.099 110.871,32.512 113.284,32.512
BOOT0: BOOT0.2 BOOT0.4 U1.94 | length 20
  Top Layer w0.152: v1(101.346,88.511) U1.94@102.687,87.169
  Bottom Layer w0.152: v1(101.346,88.511) 101.346,89.408 104.318,92.38 BOOT0.4@104.318,102.819 BOOT0.2@104.318,105.359
BOOT1: BOOT1.2 BOOT1.4 U1.37 | length 12.2
  Top Layer w0.152: U1.37@115.132,78.26 118.964,74.428 BOOT1.4@123.165,74.428 BOOT1.2@123.165,71.888
GND: C5.1 C6.1 C7.1 C8.1 C9.1 C10.1 C11.2 C12.1 C13.2 C14.2 C15.2 C16.2 C17.2 C18.2 C26.1 CLEAR.2 CON1.4 CON1.5 CON1.6 Designator15.1 JTAG.2 JTAG.4 P5.5 P5.6 P5.7 P5.9 P5.11 P5.14 P5.15 P6.21 QUERY.2 R56.2 R90.1 R91.1 R92.1 R93.1 R94.1 R95.1 R104.2 R105.1 R110.2 START.2 U1.10 U1.27 U1.49 U1.74 U1.99 U3.1 | length 57.1
  Top Layer w0.152: 94.488,80.137 92.896,80.137 92.823,80.065 92.343,80.065 92.27,80.137 89.752,80.137 88.392,78.777 88.392,75.745 C13.2@89.57,74.567 C14.2@93.32,74.567 96.154,77.401 C6.1@100.526,77.401 100.723,77.597 101.671,77.597 U1.10@103.748,79.674 ; C7.1@96.342,86.068 96.918,85.492 99.27,85.492 99.837,86.059 100.29,86.059 100.891,85.458 100.891,85.402 U1.99@100.919,85.402 ; R110.2@97.433,103.048 97.536,103.048 v1(97.536,101.981) ; U1.27@111.597,74.724 112.268,74.053 112.268,71.501 111.633,70.866 111.633,69.177 C5.1@112.776,68.034 ; U1.74@111.597,93.18 111.597,93.208 114.719,96.33 C8.1@114.719,97.714 114.719,102.044 JTAG.4@115.494,102.819 ; U1.49@119.375,82.502 121.925,79.952 C9.1@122.243,79.952
  other v1: 124.333,35.56 131.191,35.56 114.173,36.703 115.57,36.703 142.875,36.83 113.284,37.973 138.811,38.1 119.38,39.497 113.284,39.751 122.428,40.767 142.875,40.767 113.284,42.418 138.811,42.799 81.153,45.212 113.411,45.466 121.412,45.466 133.858,45.466 126.619,45.593 77.089,46.863 115.316,48.387 138.684,48.514 142.748,49.276 77.089,50.419 117.348,50.8 123.19,50.927 129.286,50.927 134.747,50.927 87.63,52.07 95.631,52.07 136.525,53.34 80.772,53.848 77.089,55.118 108.331,55.88 111.506,55.88 113.665,55.88 87.503,56.007 95.631,56.261 133.223,56.642 116.586,58.547 120.269,58.674 124.46,58.674 128.651,58.674 87.503,59.563 110.236,59.69 113.665,59.69 81.28,60.071 77.089,60.325 120.269,60.833 107.95,61.595 130.302,61.849 112.395,61.976 132.969,62.484 120.269,63.373 123.698,63.373 127,63.373 143.51,64.008 112.649,64.135 77.089,64.262 118.999,64.389 95.758,64.77 109.474,64.77 115.062,65.278 110.744,66.04 120.269,66.294 123.698,66.294 127,66.294 113.284,66.675 87.63,67.31 141.732,68.326 131.699,68.58 77.089,68.707 117.094,69.469 96.139,69.596 90.551,69.723 94.361,69.85 98.425,69.85 99.314,70.485 143.637,70.485 112.268,70.993 115.316,71.12 80.137,71.501 87.63,71.628 108.839,72.263 141.732,72.39 98.552,72.644 113.665,72.898 92.456,73.025 112.268,73.025 132.969,73.152 77.089,73.66 96.774,74.295 131.953,74.676 87.63,75.057 100.203,75.565 110.109,75.692 80.137,76.073 95.504,76.327 91.44,76.454 118.364,76.454 97.155,77.724 98.806,77.724 117.094,77.724 111.76,78.105 77.089,78.74 94.996,79.629 80.137,80.264 108.966,81.153 90.678,81.661 126.238,81.915 131.699,81.915 106.299,82.042 115.443,82.042 103.632,82.169 117.348,82.931 108.458,83.058 111.252,83.058 137.795,83.185 98.171,83.693 93.345,84.582 117.729,84.963 123.063,85.09 98.171,85.598 112.014,85.598 109.601,85.979 105.029,86.233 126.365,86.487 131.699,86.487 115.062,86.614 93.345,87.249 98.171,87.249 101.092,87.63 120.65,87.63 113.157,88.265 91.821,88.773 110.998,89.408 96.266,89.916 98.806,89.916 108.712,90.17 123.063,90.932 128.651,91.059 77.216,92.837 80.391,92.837 78.74,95.25 86.995,97.028 89.662,97.028 96.012,97.028 100.584,97.028 77.216,97.282 105.156,97.536 109.347,97.917 111.506,97.917 142.621,98.425 118.745,98.806 122.301,98.806 94.107,100.33 98.679,100.33 102.362,100.33 105.156,100.33 77.216,101.346 88.392,101.727 142.494,103.251 130.937,104.013 139.065,104.013 77.216,104.902 82.804,105.029 88.392,105.029 94.107,105.029 142.367,108.839 82.931,109.22 88.265,109.347 94.615,109.347 101.092,109.347 108.077,109.347 115.57,109.347 123.19,109.347 130.937,109.347 139.065,109.347 77.216,109.474 77.216,113.284 142.24,113.411 79.121,114.554 77.216,115.697 82.931,115.697 88.265,115.697 94.488,115.697 101.092,115.697 108.077,115.697 115.57,115.697 123.19,115.697 130.937,115.697 139.065,115.697 66.802,118.999 66.802,122.682 71.628,122.682 77.089,122.682 82.931,122.682 88.265,122.682 94.488,122.682 101.092,122.682 108.077,122.682 115.57,122.682 123.19,122.682 130.937,122.682 139.065,122.682 144.78,122.682 150.749,122.682
  other v3: 124.812,29.502 129.212,29.502
JNTRST: JTAG.9 U1.90 | length 21.3
  Top Layer w0.152: U1.90@104.101,88.584 105.436,87.249 v1(105.41,87.249)
  Bottom Layer w0.152: v1(105.41,87.249) 105.791,87.249 106.02,87.478 106.02,103.505 JTAG.9@107.874,105.359
JTCK: JTAG.3 U1.76 | length 17.4
  Top Layer w0.152: U1.76@109.051,93.533 108.356,94.228 108.356,100.101 109.347,101.092 113.284,101.092 114.3,102.108 114.3,104.165 JTAG.3@115.494,105.359
JTDI: JTAG.5 U1.77 | length 15.7
  Top Layer w0.152: U1.77@108.698,93.18 107.95,93.927 107.95,100.27 109.179,101.498 111.15,101.498 111.76,102.108 111.76,104.165 JTAG.5@112.954,105.359
JTDO: JTAG.7 U1.89 | length 24
  Top Layer w0.152: U1.89@104.455,88.937 105.563,87.829 105.65,87.829 105.99,87.489 105.99,87.402 106.397,86.995 v1(106.461,87.058)
  Bottom Layer w0.152: v1(106.461,87.058) 106.489,87.058 106.934,87.503 106.934,102.231 106.794,102.372 106.794,103.492 107.442,104.14 109.195,104.14 JTAG.7@110.414,105.359
JTMS: JTAG.1 U1.72 | length 15.3
  Top Layer w0.152: U1.72@112.304,92.473 116.713,96.882 116.713,104.14 117.932,105.359 JTAG.1@118.034,105.359
KEY1: CLEAR.1 P5.3 U1.15 | length 41.6
  Top Layer w0.152: v1(88.265,61.087) 89.154,60.198 CLEAR.1@89.916,60.198 ; v1(89.916,61.341) CLEAR.1@89.916,60.198 ; CLEAR.1@89.917,52.142 CLEAR.1@89.917,59.762 89.916,59.763 CLEAR.1@89.916,60.198 ; v1(104.521,74.93) 104.521,76.884 105.516,77.878 U1.15@105.516,77.906
  Bottom Layer w0.152: P5.3@85.298,61.341 P5.3@85.147,61.492 87.86,61.492 v1(88.265,61.087) ; v1(89.916,61.341) 89.916,66.04 92.401,68.525 99.005,68.525 103.124,72.644 103.124,73.533 v1(104.521,74.93)
KEY2: START.1 U1.16 | length 32.5
  Top Layer w0.152: U1.16@105.869,77.525 U1.16@105.869,77.553 106.93,78.613 v1(108.204,78.613) ; START.1@112.377,52.142 START.1@112.377,59.762 111.941,60.198 113.792,62.049 v1(113.792,62.992)
  Bottom Layer w0.152: v1(108.204,78.613) 111.252,75.565 111.252,66.989 113.792,64.449 v1(113.792,62.992)
KEY3: QUERY.1 U1.17 | length 45.4
  Top Layer w0.152: U1.17@106.223,77.171 U1.17@106.223,77.199 106.251,77.199 106.251,77.255 106.852,77.856 108.336,77.856 v1(109.093,78.613) ; v1(118.491,61.849) 128.29,61.849 QUERY.1@130.377,59.762 QUERY.1@130.377,52.142
  Bottom Layer w0.152: v1(109.093,78.613) 111.658,76.048 111.658,67.158 116.967,61.849 v1(118.491,61.849)
LED1: P5.34 R63.1 U1.97 | length 49.8
  Top Layer w0.152: R63.1@75.467,116.497 78.448,116.497 80.035,114.91 80.035,102.164 P5.34@82.607,99.592 ; v1(94.234,89.281) 94.234,89.154 94.336,89.052 98.683,89.052 U1.97@101.627,86.109
  Bottom Layer w0.152: P5.34@82.607,99.592 83.774,98.425 91.059,98.425 94.205,95.279 94.205,89.31 v1(94.234,89.281)
LED2: P5.32 R65.1 U1.98 | length 42
  Top Layer w0.152: R65.1@75.467,107.25 77.916,107.25 79.223,105.943 79.223,100.436 P5.32@82.607,97.052 ; v1(93.599,88.519) 93.671,88.591 98.437,88.591 U1.98@101.273,85.755
  Bottom Layer w0.152: P5.32@82.607,97.052 83.774,95.885 92.71,95.885 93.798,94.797 93.798,89.861 93.599,89.662 v1(93.599,88.519)
LED3: P5.30 R67.1 U1.1 | length 32.8
  Top Layer w0.152: R67.1@75.467,98.091 78.566,98.091 82.145,94.512 P5.30@82.607,94.512 83.288,94.512 84.582,93.218 85.725,93.218 90.932,88.011 90.932,85.664 93.792,82.804 100.514,82.804 U1.1@100.566,82.856
LED4: P5.28 R74.1 U1.2 | length 32.7
  Top Layer w0.152: R74.1@75.467,88.935 76.108,88.935 78.105,90.932 82.607,90.932 ; P5.28@82.607,91.972 82.607,90.932 ; U1.2@100.919,82.502 100.891,82.502 100.891,82.446 100.291,81.846 98.439,81.846 97.887,82.398 93.624,82.398 90.526,85.496 90.526,87.782 87.63,90.678 84.914,90.678 84.66,90.932 82.607,90.932
LED5: P5.26 R76.1 U1.3 | length 36.9
  Top Layer w0.152: R76.1@75.467,79.78 76.962,81.275 76.962,87.376 79.018,89.432 P5.26@82.607,89.432 ; P5.26@82.677,89.281 83.185,89.281 84.114,88.352 87.096,88.352 93.456,81.992 97.718,81.992 98.271,81.44 100.592,81.44 101.245,82.092 101.245,82.149 U1.3@101.273,82.149
LED6: P5.24 R78.1 U1.4 | length 43.4
  Top Layer w0.152: R78.1@75.467,70.624 77.774,72.931 77.774,86.156 78.51,86.892 P5.24@82.607,86.892 83.415,86.892 84.709,85.598 89.276,85.598 93.288,81.586 97.55,81.586 98.103,81.034 100.893,81.034 101.598,81.739 101.598,81.795 U1.4@101.627,81.795
LED7: P5.22 R80.1 U1.5 | length 49.3
  Top Layer w0.152: R80.1@75.467,61.469 78.613,64.615 78.613,84.074 78.891,84.352 P5.22@82.607,84.352 83.901,83.058 91.241,83.058 93.146,81.153 97.409,81.153 97.934,80.628 101.166,80.628 U1.5@101.98,81.442
LED8: P5.12 R82.1 U1.38 | length 59.8
  Top Layer w0.152: R82.1@75.467,52.313 79.426,56.272 79.426,69.139 81.939,71.652 P5.12@82.607,71.652 ; v1(111.887,80.264) 112.594,79.557 114.542,79.557 U1.38@115.486,78.613
  Bottom Layer w0.152: P5.12@82.607,71.652 83.853,72.898 89.789,72.898 97.155,80.264 v1(111.887,80.264)
LED9: P5.10 R84.1 U1.39 | length 67.4
  Top Layer w0.152: R84.1@75.518,43.183 77.724,45.389 77.724,52.33 80.238,54.844 80.238,66.743 P5.10@82.607,69.112 ; v1(113.03,80.391) 113.225,80.391 113.552,80.065 114.734,80.065 114.738,80.069 U1.39@115.839,78.967
  Bottom Layer w0.152: P5.10@82.607,69.112 82.955,69.112 84.328,70.485 87.951,70.485 97.065,79.6 112.112,79.6 112.903,80.391 v1(113.03,80.391)
LED10: P5.8 R86.1 U1.40 | length 76.6
  Top Layer w0.152: R86.1@75.467,34.002 77.309,34.002 78.13,34.823 78.13,52.162 80.645,54.676 80.645,64.61 P5.8@82.607,66.572 ; v1(114.046,80.645) 114.868,80.645 U1.40@116.193,79.32
  Bottom Layer w0.152: P5.8@82.607,66.572 83.98,67.945 85.985,67.945 97.234,79.193 112.653,79.193 114.046,80.586 v1(114.046,80.645)
LED11: P6.14 R87.2 U1.41 | length 73.5
  Top Layer w0.152: U1.41@116.547,79.674 120.301,75.92 134.679,75.92 P6.14@136.407,74.192 ; v1(140.716,73.533) 140.597,73.652 140.597,114.546 140.589,114.554 142.437,116.402 R87.2@145.21,116.402
  Bottom Layer w0.152: P6.14@136.407,74.192 137.487,73.112 140.295,73.112 v1(140.716,73.533)
LED12: P6.13 R85.2 U1.42 | length 62.1
  Top Layer w0.152: U1.42@116.9,80.028 120.602,76.326 134.875,76.326 135.636,75.565 137.574,75.565 P6.13@138.947,74.192 ; v1(141.177,75.568) 141.025,75.72 141.025,105.338 142.937,107.25 R85.2@145.21,107.25
  Bottom Layer w0.152: P6.13@138.947,74.192 139.801,74.192 v1(141.177,75.568)
LED13: P6.16 R83.2 U1.43 | length 48.4
  Top Layer w0.152: U1.43@117.254,80.381 120.903,76.732 P6.16@136.407,76.732 ; v1(141.605,77.851) 141.605,85.877 142.215,86.487 142.215,95.86 144.192,97.837 R83.2@145.21,97.837
  Bottom Layer w0.152: P6.16@136.407,76.732 137.526,77.851 v1(141.605,77.851)
LED14: P6.15 R81.2 U1.44 | length 41.9
  Top Layer w0.152: U1.44@117.607,80.735 121.146,77.196 134.854,77.196 135.636,77.978 137.701,77.978 P6.15@138.947,76.732 ; v1(143.303,77.191) 143.303,86.092 143.057,86.338 143.057,88.447 143.393,88.783 R81.2@145.21,88.783 R81.2@145.21,88.754
  Bottom Layer w0.152: P6.15@138.947,76.732 142.844,76.732 v1(143.303,77.191)
LED15: P6.18 R79.2 U1.45 | length 30.4
  Top Layer w0.152: U1.45@117.961,81.088 121.447,77.602 134.117,77.602 135.787,79.272 P6.18@136.407,79.272 ; v1(144.399,80.645) 144.399,80.544 145.187,79.756 R79.2@145.21,79.78
  Bottom Layer w0.152: P6.18@136.407,79.272 137.136,79.272 138.509,80.645 v1(144.399,80.645)
LED16: P6.17 R77.2 U1.46 | length 36.9
  Top Layer w0.152: U1.46@118.314,81.442 121.748,78.008 133.38,78.008 136.017,80.645 137.574,80.645 P6.17@138.947,79.272 ; v1(142.24,79.248) 142.24,73.595 R77.2@145.21,70.624
  Bottom Layer w0.152: P6.17@138.947,79.272 138.971,79.248 v1(142.24,79.248)
LED17: P6.7 R75.2 U1.29 | length 38.9
  Top Layer w0.152: U1.29@112.304,75.431 120.298,67.437 v1(128.016,67.437) ; v1(132.461,67.437) 135.001,67.437 135.255,67.691 137.828,67.691 P6.7@138.947,66.572 139.069,66.572 144.172,61.469 R75.2@145.21,61.469
  Bottom Layer w0.152: v1(128.016,67.437) v1(132.461,67.437)
LED18: P6.5 R68.2 U1.30 | length 47.3
  Top Layer w0.152: U1.30@112.657,75.785 120.425,68.017 128.833,68.017 129.032,67.818 v1(129.032,66.548) ; v1(132.461,66.548) 134.239,66.548 135.382,65.405 136.779,65.405 138.152,64.032 P6.5@138.947,64.032 139.93,64.032 142.34,61.622 142.34,54.256 144.283,52.313 R68.2@145.21,52.313
  Bottom Layer w0.152: v1(129.032,66.548) v1(132.461,66.548)
LED19: P6.3 R66.2 U1.31 | length 55.6
  Top Layer w0.152: U1.31@113.011,76.138 120.726,68.423 129.443,68.423 129.921,67.945 v1(129.921,65.659) ; v1(132.461,65.659) 132.969,65.659 136.056,62.572 137.867,62.572 P6.3@138.947,61.492 139.488,61.492 141.528,59.452 141.528,45.162 143.532,43.158 R66.2@145.21,43.158
  Bottom Layer w0.152: v1(129.921,65.659) v1(132.461,65.659)
LED20: P6.1 R64.2 U1.32 | length 64.3
  Top Layer w0.152: U1.32@113.365,76.492 120.948,68.909 130.1,68.909 131.064,67.945 131.064,62.865 133.858,60.071 137.828,60.071 P6.1@138.947,58.952 138.947,56.986 140.716,55.217 140.716,36.83 143.544,34.002 R64.2@145.21,34.002
NetB21_1: B21.1 D1.1 U1.6 | length 45.2
  Top Layer w0.152: D1.1@94.59,86.547 95.123,87.081 v1(95.123,88.011) ; v1(95.885,80.518) 96.181,80.222 101.495,80.222 102.305,81.032 102.305,81.088 U1.6@102.334,81.088
  Bottom Layer w0.152: B21.1@85.09,107.62 93.548,107.62 95.123,106.045 v1(95.123,88.011) 95.123,81.28 v1(95.885,80.518)
NetC3_2: C3.2 C4.2 R89.2 R96.1 R97.1 U2.1 | length 9.8
  Top Layer w0.152: C4.2@99.377,67.132 99.377,65.583 C3.2@99.327,65.532 R89.2@101.092,65.532 ; U2.1@100.711,62.941 100.711,65.151 R89.2@101.092,65.532 ; R96.1@102.946,63.869 102.972,63.894 R97.1@102.972,65.569 102.958,65.583 R89.2@101.143,65.583 R89.2@101.092,65.532
NetC12_2: C12.2 U3.4 | length 7.5
  Top Layer w0.3: U3.4@128.498,42.473 128.498,41.047 128.818,40.727 C12.2@134.472,40.727
NetC16_1: C16.1 U3.7 Y3.1 | length 12.1
  Top Layer w0.3: C16.1@115.862,37.973 116.748,37.087 Y3.1@119.422,37.087 120.399,37.087 124.688,41.376 U3.7@124.688,42.473
NetC17_1: C17.1 U3.8 Y3.2 | length 8.2
  Top Layer w0.3: C17.1@115.862,41.275 116.754,42.167 Y3.2@119.422,42.167 123.418,42.167 U3.8@123.418,42.473
NetC22_1: C22.1 C23.1 C25.1 D3.1 R107.2 U5.3 | length 18.4
  Top Layer w1.2: D3.1@103.072,52.427 103.141,52.358 R107.2@103.141,46.533 103.124,46.515 103.124,40.427 U5.3@102.172,40.427 103.337,40.427 104.597,39.167 C25.1@104.597,36.654
NetCON1_2: CON1.2 U3.6 | length 10.6
  Top Layer w0.3: U3.6@125.958,42.473 125.958,40.158 v2(125.984,40.132) ; v2(125.984,34.925) 126.212,34.697 CON1.2@126.212,31.977
  Bottom Layer w0.3: v2(125.984,34.925) v2(125.984,40.132)
NetCON1_3: CON1.3 U3.5 | length 10.6
  Top Layer w0.3: CON1.3@127.012,31.977 127.012,34.683 v2(127.254,34.925) ; U3.5@127.228,42.473 127.228,40.158 v2(127.254,40.132)
  Bottom Layer w0.3: v2(127.254,34.925) v2(127.254,40.132)
NetD4_A: D4.1 R107.1 | length 7
  Top Layer w0.152: R107.1@104.681,46.533 105.816,46.533 D4.1@109.982,42.367
NetLED1_1: LED1.1 LED2.1 LED3.1 LED4.1 LED5.1 LED6.1 LED7.1 LED8.1 LED9.1 LED10.1 LED11.1 LED12.1 LED13.1 LED14.1 LED15.1 LED16.1 LED17.1 LED18.1 LED19.1 LED20.1 R62.2 | length 359.6
  Top Layer w0.3: v2(70.231,53.442) 70.231,52.482 LED16.1@70.399,52.313 ; v2(70.231,62.535) 70.231,61.637 LED14.1@70.399,61.469 ; v2(70.231,71.857) 70.231,70.793 LED12.1@70.399,70.624 ; v2(70.231,90.119) 70.231,89.104 LED8.1@70.399,88.935 ; v2(70.231,99.212) 70.231,98.259 LED6.1@70.399,98.091 ; v2(70.231,108.483) 70.231,107.418 LED4.1@70.399,107.25 ; v2(70.231,117.78) 70.231,116.97 70.079,116.818 LED2.1@70.399,116.497 ; v2(70.256,44.272) 70.256,43.377 LED18.1@70.45,43.183 ; v2(70.282,80.899) 70.282,79.897 LED10.1@70.399,79.78 ; LED20.1@70.399,34.002 70.307,34.094 v2(70.307,35.154) v2@77.089,35.154 ; R62.2@137.351,32.004 137.668,32.321 v2(137.668,33.528) ; v2(143.764,35.306) v2(150.241,35.306) 150.241,34.018 LED1.1@150.225,34.002 ; LED3.1@150.225,43.158 150.241,43.174 v2(150.241,44.577) ; LED5.1@150.225,52.313 150.241,52.329 v2(150.241,53.594) ; LED7.1@150.225,61.469 150.241,61.485 v2(150.241,62.865) ; LED9.1@150.225,70.624 150.241,70.64 v2(150.241,72.009) ; LED11.1@150.225,79.78 150.241,79.796 v2(150.241,81.153) ; LED13.1@150.225,88.783 150.241,88.799 v2(150.241,90.17) ; LED15.1@150.225,97.837 150.241,97.853 v2(150.241,99.187) ; LED17.1@150.225,107.25 150.241,107.266 v2(150.241,108.839) ; LED19.1@150.225,116.402 150.241,116.418 v2(150.241,117.856)
  Bottom Layer w0.3: v2(70.307,35.154) 70.256,35.204 v2(70.256,44.272) 70.231,44.298 v2(70.231,53.442) v2(70.231,62.535) v2(70.231,71.857) 70.282,71.907 v2(70.282,80.899) 70.231,80.95 v2(70.231,90.119) v2(70.231,99.212) v2(70.231,108.483) v2(70.231,117.78) ; v2(77.089,35.179) 90.17,35.179 95.758,40.767 107.696,40.767 113.157,35.306 121.412,35.306 123.19,33.528 v2(137.668,33.528) 139.446,35.306 v2(143.764,35.306) ; v2(150.241,35.306) v2(150.241,44.577) v2(150.241,53.594) v2(150.241,62.865) v2(150.241,72.009) v2(150.241,81.153) v2(150.241,90.17) v2(150.241,99.187) v2(150.241,108.839) v2(150.241,117.856) v2@70.155,117.856 ; v2@70.155,117.856 v2(70.231,117.78) ; v2@70.155,117.856 v2(70.231,117.78)
NetLED1_2: LED1.2 R64.1 | length 1.5
  Top Layer w0.152: R64.1@146.71,34.002 LED1.2@148.225,34.002
NetLED2_2: LED2.2 R63.2 | length 1.6
  Top Layer w0.152: LED2.2@72.399,116.497 R63.2@73.967,116.497
NetLED3_2: LED3.2 R66.1 | length 1.5
  Top Layer w0.152: R66.1@146.71,43.158 LED3.2@148.225,43.158
NetLED4_2: LED4.2 R65.2 | length 1.6
  Top Layer w0.152: LED4.2@72.399,107.25 R65.2@73.967,107.25
NetLED5_2: LED5.2 R68.1 | length 1.5
  Top Layer w0.152: R68.1@146.71,52.313 LED5.2@148.225,52.313
NetLED6_2: LED6.2 R67.2 | length 1.6
  Top Layer w0.152: LED6.2@72.399,98.091 R67.2@73.967,98.091
NetLED7_2: LED7.2 R75.1 | length 1.5
  Top Layer w0.152: R75.1@146.71,61.469 LED7.2@148.225,61.469